# EAGLE board Paralysis_Assist_v1 (EAGLE 9.6.2)
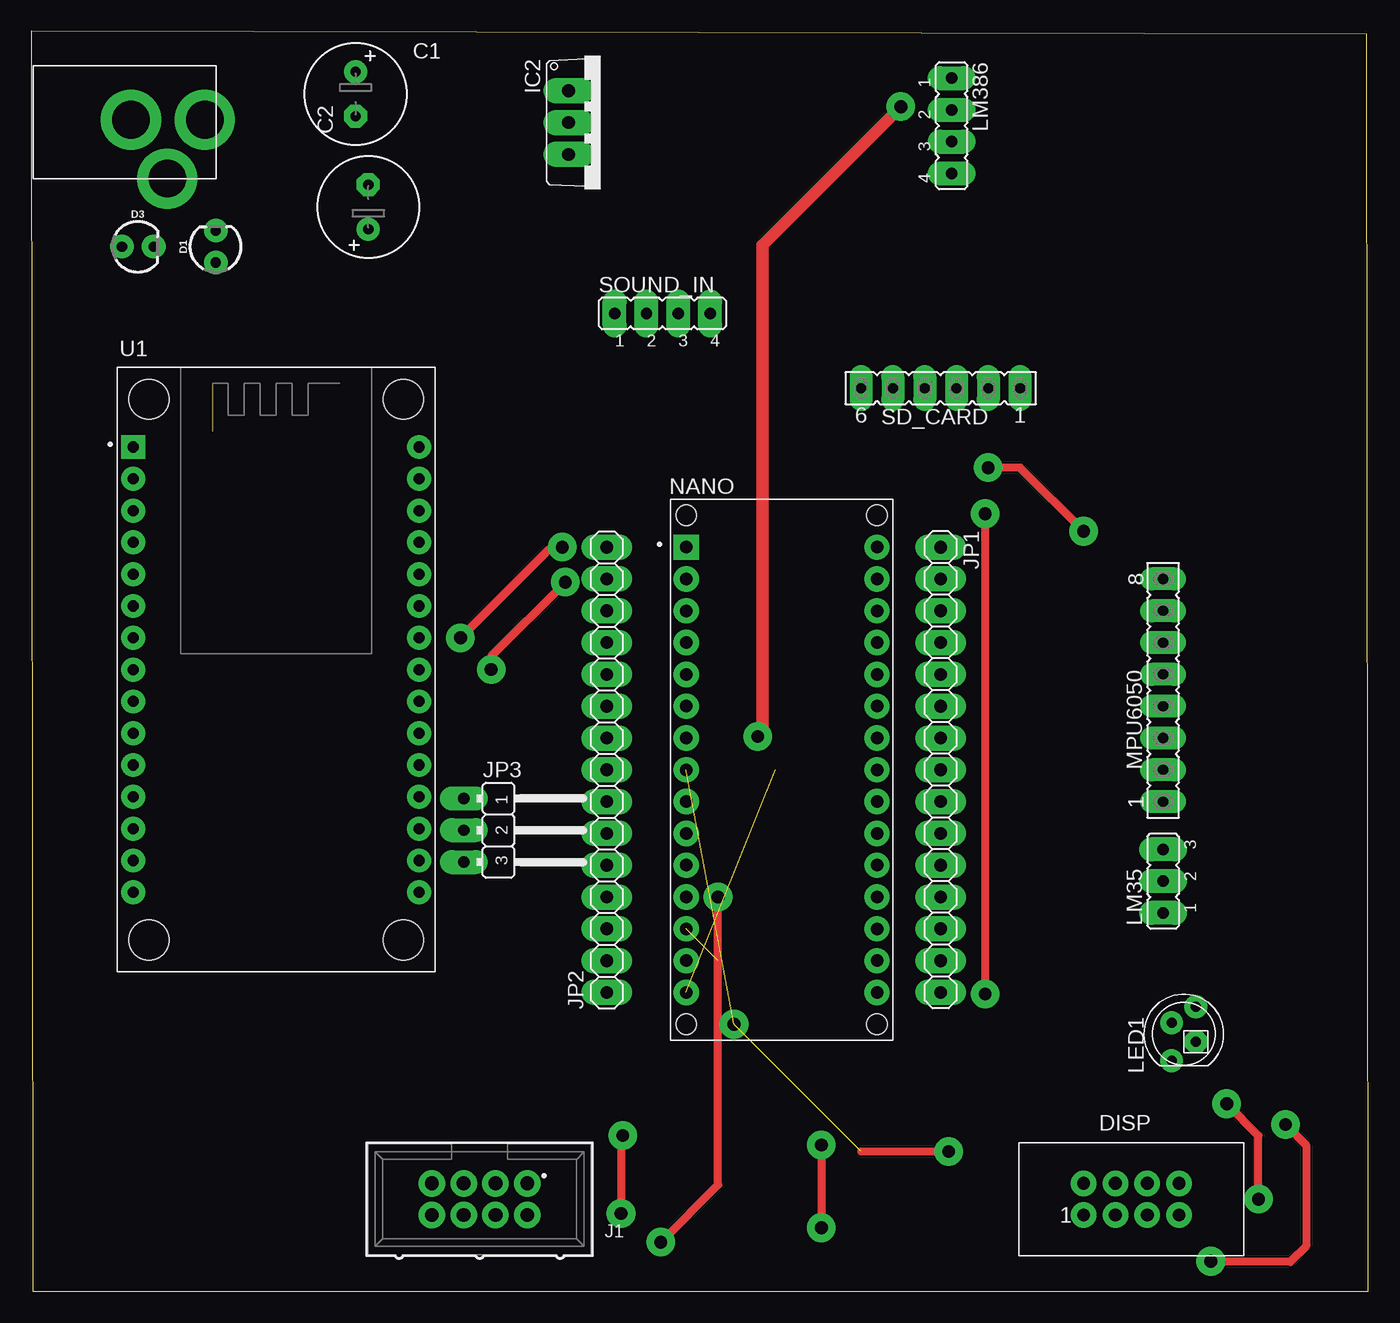
[diagram p0: board, top side]
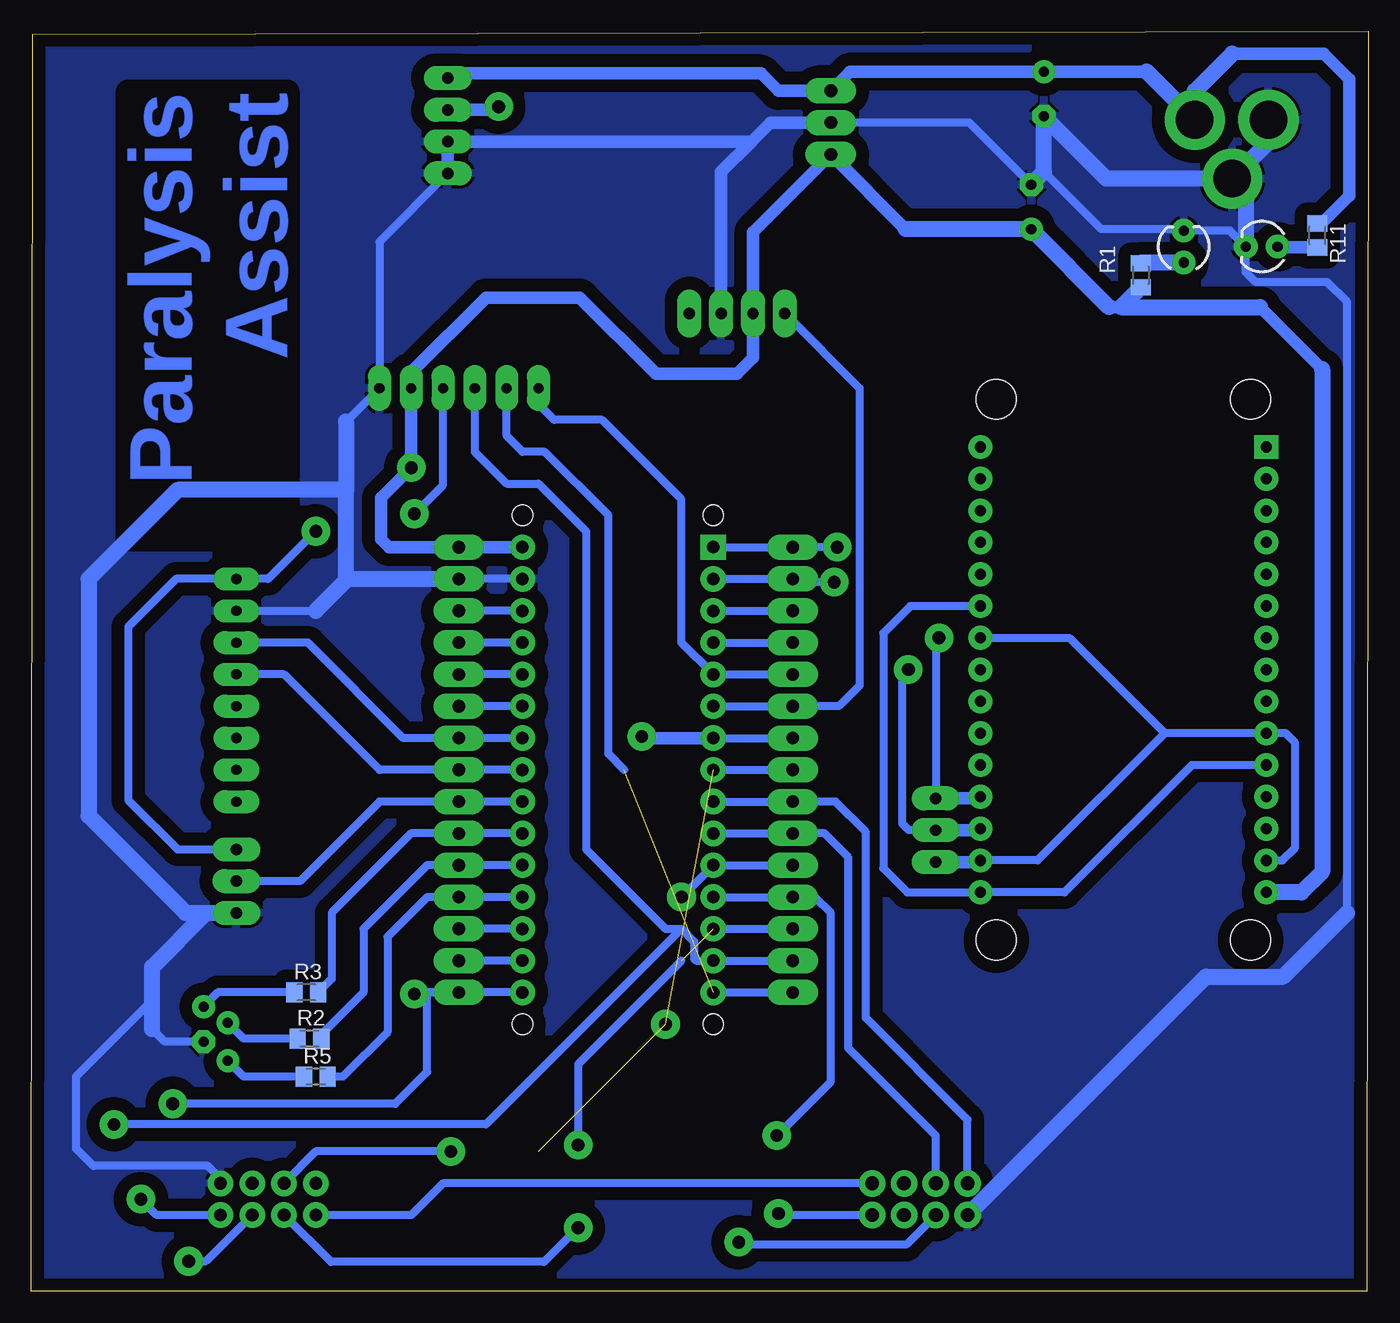
[diagram p1: board, bottom side, seen from below]

Size 106.81 x 100.64 mm. Coordinates in mm from the lower left corner, seen from the top.
Outline: 0.13,0 106.81,0 106.68,100.38 0,100.64 0.13,0
Copper layers (1*16): Top 0.035mm / dielectric 1.5mm / Bottom 0.035mm
Design rules "default *": minimum track width 25mil, minimum drill 0.35mm, track to track 6mil, track to pad 6mil, pad to pad 6mil, via to via 6mil, smd to smd 6mil, copper to edge 40mil, drill to drill 6mil, minimum pad ring 20mil, minimum via ring 25mil, stop-mask expansion 4mil, vias tented up to drill 0mil, thermal gap 10mil

## Footprints (pad centres in the part's own frame; a part is rotated, then mirrored left to right if it is on the bottom)
E3,5-8 = drill 0.813 pad 1.6: + -1.778,0 | drill 0.813 pad 1.6 octagon: - 1.778,0
LED_3MM = drill 0.813 pad 1.88: A -1.27,0; K 1.27,0
612008235121 = drill 1.02: 1 -3.81,-1.27; 2 -3.81,1.27; 3 -1.27,-1.27; 4 -1.27,1.27; 5 1.27,-1.27; 6 1.27,1.27; 7 3.81,-1.27; 8 3.81,1.27
TO220V = drill 1.016 long: 1 -2.54,-2.54; 2 0,-2.54; 3 2.54,-2.54
61200821621 = drill 1.1: 1 -3.81,-1.27; 2 -3.81,1.27; 3 -1.27,-1.27; 4 -1.27,1.27; 5 1.27,-1.27; 6 1.27,1.27; 7 3.81,-1.27; 8 3.81,1.27
1X15 = drill 1.016 long: 1 -17.78,0; 2 -15.24,0; 3 -12.7,0; 4 -10.16,0; 5 -7.62,0; 6 -5.08,0; 7 -2.54,0; 8 0,0; 9 2.54,0; 10 5.08,0; 11 7.62,0; 12 10.16,0; 13 12.7,0; 14 15.24,0; 15 17.78,0
JP2W = drill 0.914 long: 1 -2.54,-1.27; 2 0,-1.27; 3 2.54,-1.27
LED5MMRGB = drill 0.8 pad 1.676: 1 -2.159,0.968; 3 0.889,0.968; 4 2.159,-0.968 | drill 0.8 pad 1.676 octagon: 2 -0.635,-0.968
JP2 = drill 0.914 long: 1 -2.54,0; 2 0,0; 3 2.54,0
JP4 = drill 0.914 long: 1 -3.81,0; 2 -1.27,0; 3 1.27,0; 4 3.81,0
FE08 = drill 0.813 long: 1 -8.89,0; 2 -6.35,0; 3 -3.81,0; 4 -1.27,0; 5 1.27,0; 6 3.81,0; 7 6.35,0; 8 8.89,0
MODULE_A000005 = drill 1 square: 1 -7.62,17.78 | drill 1: 2 -7.62,15.24; 3 -7.62,12.7; 4 -7.62,10.16; 5 -7.62,7.62; 6 -7.62,5.08; 7 -7.62,2.54; 8 -7.62,0; 9 -7.62,-2.54; 10 -7.62,-5.08; 11 -7.62,-7.62; 12 -7.62,-10.16; 13 -7.62,-12.7; 14 -7.62,-15.24; 15 -7.62,-17.78; 16 7.62,-17.78; 17 7.62,-15.24; 18 7.62,-12.7; 19 7.62,-10.16; 20 7.62,-7.62; 21 7.62,-5.08; 22 7.62,-2.54; 23 7.62,0; 24 7.62,2.54; 25 7.62,5.08; 26 7.62,7.62; 27 7.62,10.16; 28 7.62,12.7; 29 7.62,15.24; 30 7.62,17.78 | hole 1.651: -7.62,-20.32; 7.62,-20.32; -7.62,20.32; 7.62,20.32
M0805 = smd 1.3 x 1.6: 1 -0.95,0; 2 0.95,0
FE06 = drill 0.813 long: 1 -6.35,0; 2 -3.81,0; 3 -1.27,0; 4 1.27,0; 5 3.81,0; 6 6.35,0
MODULE_ZC563900 = drill 0.889 pad 1.753 square: 1 -11.43,17.78 | drill 0.889 pad 1.753: 2 -11.43,15.24; 3 -11.43,12.7; 4 -11.43,10.16; 5 -11.43,7.62; 6 -11.43,5.08; 7 -11.43,2.54; 8 -11.43,0; 9 -11.43,-2.54; 10 -11.43,-5.08; 11 -11.43,-7.62; 12 -11.43,-10.16; 13 -11.43,-12.7; 14 -11.43,-15.24; 15 -11.43,-17.78; 16 11.43,-17.78; 17 11.43,-15.24; 18 11.43,-12.7; 19 11.43,-10.16; 20 11.43,-7.62; 21 11.43,-5.08; 22 11.43,-2.54; 23 11.43,0; 24 11.43,2.54; 25 11.43,5.08; 26 11.43,7.62; 27 11.43,10.16; 28 11.43,12.7; 29 11.43,15.24; 30 11.43,17.78 | hole 3.2: -10.16,21.59; 10.16,21.59; 10.16,-21.59; -10.16,-21.59
PJ-102A = drill 3 pad 4.8: RING 0.1,-3.39; RING_SW -4.6,-6.29; TIP 0.1,-9.29

## Placement (x,y rotation side)
C1  [E3,5-8]  25.91,95.63 270 top
C2  [E3,5-8]  26.92,86.61 90 top
D1  [LED_3MM]  14.73,83.44 90 top
D3  [LED_3MM]  8.51,83.44 0 top
DISP  [612008235121]  87.88,7.37 0 top
IC2  7805TV  [TO220V]  45.47,93.34 270 top
J1  [61200821621]  35.81,7.37 180 top
JP1  [1X15]  72.64,41.66 270 top
JP2  [1X15]  45.97,41.66 90 top
JP3  [JP2W]  35.81,36.83 270 top
LED1  RGBLED_CA-5MM  [LED5MMRGB]  92.08,20.57 90 top
LM35  [JP2]  90.42,32.77 90 top
LM386  [JP4]  73.53,93.09 270 top
MPU6050  [FE08]  90.42,48.01 90 top
NANO  A000005  [MODULE_A000005]  59.94,41.66 0 top
R1  1k  [M0805]  18.16,81.15 90 bottom
R2  1k  [M0805]  84.58,20.19 0 bottom
R3  1k  [M0805]  84.84,23.88 0 bottom
R5  1k  [M0805]  84.07,17.14 0 bottom
R11  1k  [M0805]  4.06,84.33 270 bottom
SD_CARD  [FE06]  72.64,72.14 180 top
SOUND_IN  [JP4]  50.42,78.11 0 top
U1  ZC563900  [MODULE_ZC563900]  19.56,49.66 0 top
U$3  2.1MMJACKTHM  [PJ-102A]  4.57,93.47 90 top

## Library data of the parts
C1 C2 JP1 JP2 LED1 R1-R3 R5 R11 U$3 = adafruit
D1 D3 = SparkFun-LED; PROD_ID: DIO-08794
DISP = Wurth_Elektronik_Electromechanic_Wire_to_Board_Connectors_rev19a
IC2 = linear
J1 = Wurth_Connectors_WR-BHD; CONTACT-RESISTANCE: 20mOhm; DATASHEET-URL: https://katalog.we-online.com/em/datasheet/61200821621.pdf; GENDER: Male; IR: 3A; L: 17.82mm; MATES: WR-BHD 2.54mm Female IDC Connector with Strain Relief; MOUNT: THT; PACKAGING: Tray; PART-NUMBER: 61200821621; PINS: 8; PITCH: 2.54mm; TOL-R: max.; TYPE: Straight; WORKING-VOLTAGE: 250V(AC)
JP3 LM35 LM386 SOUND_IN = jumper
MPU6050 SD_CARD = con-lsta; OC_FARNELL: unknown; OC_NEWARK: unknown
NANO = A000005; AVAILABILITY: Good; DESCRIPTION: ATmega328 Arduino Nano AVR® ATmega AVR MCU 8-Bit Embedded Evaluation Board; MF: Arduino; MP: A000005; PACKAGE: None; PRICE: None; PURCHASE-URL: https://pricing.snapeda.com/search/part/A000005/?ref=eda
U1 = nodemcuZC563900; AVAILABILITY: Unavailable; DESCRIPTION: NodeMcu Lua ESP8266 WIFI Internet of Things Network Development Module Board; MF: YKS; MP: ZC563900; PACKAGE: None; PRICE: None

## Nets
3V3: U1.11 U1.16 U1.25
5V: C2.+ IC2.3 JP1.1 LM35.3 MPU6050.8 NANO.30 R1.1 SD_CARD.2 SOUND_IN.2 U1.15
5V0: JP1.4 NANO.27
9_IN: C1.+ IC2.1 LM386.1 R11.1 U$3.TIP
A6: JP1.6 NANO.25
A7: JP1.5 NANO.26
AD0: MPU6050.2
AREF: JP1.13 NANO.18
AUDIO_OUT: JP2.9 LM386.2 NANO.7
BACK: J1.6 JP2.5 NANO.11
BLUE: JP1.10 NANO.21 R3.2
CS_DISP: DISP.3 JP2.3 NANO.13
CS_SDCARD: JP2.11 NANO.5 SD_CARD.6
DOWN: J1.4
GND: C1.- C2.- D1.K D3.K DISP.8 IC2.2 J1.8 JP1.2 LED1.2 LM35.1 LM386.3 LM386.4 MPU6050.7 NANO.29 SD_CARD.1 SOUND_IN.3 U$3.RING U$3.RING_SW
GND_1: JP2.12 NANO.4
GREEN: JP1.11 NANO.20 R2.2
INT: MPU6050.1
LEFT: J1.5 JP2.6 NANO.10
MISO: JP2.1 NANO.15 SD_CARD.5
MOSI: DISP.5 JP2.2 NANO.14 SD_CARD.4
N$1: DISP.2
N$2: D3.A R11.2
N$3: D1.A R1.2
N$4: LED1.4 R3.1
N$5: DISP.6
N$6: LED1.3 R2.1
N$7: LED1.1 R5.1
N$8: JP1.14 NANO.17
N$10: JP3.3 U1.10 U1.14 U1.17 U1.24
OK: J1.7 JP2.7 NANO.9
RED: JP1.12 NANO.19 R5.2
RESET_1: JP2.13 NANO.3
RESET_2: JP1.3 NANO.28
RIGHT: J1.2 JP2.4 NANO.12
RST: DISP.4 JP2.8 NANO.8
RXNANO: JP2.14 JP3.2 NANO.2 U1.18
SCK: DISP.7 JP1.15 NANO.16 SD_CARD.3
SCL: JP1.7 MPU6050.6 NANO.24
SDA: JP1.8 MPU6050.5 NANO.23
SOUND_A0: SOUND_IN.4
SOUND_D0: JP2.10 NANO.6 SOUND_IN.1
TEMP: JP1.9 LM35.2 NANO.22
TXNANO: JP2.15 JP3.1 NANO.1 U1.19
UP: J1.3
VCC: DISP.1 J1.1
XCL: MPU6050.3
XDA: MPU6050.4

## Tracks (layer width: path | path; a pad name or v marks a point on that pad's centre or on a via)
3V3
  Bottom 0.635: U1.11 14.1,42.04 24.26,31.88 U1.16 36.83,31.88 38.73,33.78 38.73,52.58 36.58,54.74 U1.25
5V  (via drill 1.02)
  Top 0.635: v84.07,60.71 78.99,65.79 v76.45,65.79
  Bottom 0.635: v84.07,60.71 87.88,56.9 MPU6050.8 95.25,56.9 99.06,53.09 99.06,39.24 95.12,35.31 LM35.3 | 62.74,79.38 62.99,79.38
  Bottom 1.016: 36.96,84.84 IC2.3 49.15,84.58 SOUND_IN.2 49.15,74.55 50.42,73.28 56.9,73.28 62.99,79.38 70.48,79.38 76.45,73.41 SD_CARD.2 v76.45,65.79 78.87,63.37 78.87,60.07 78.23,59.44 JP1.1 NANO.30 | 8.64,78.61 3.68,73.66 | 19.75,78.61 20.7,78.61
  Bottom 1.27: 20.7,78.61 C2.+ 36.96,84.84 | 8.64,78.61 19.75,78.61 R1.1 | U1.15 5.33,31.88 3.68,33.53 3.68,73.66
5V0
  Bottom 0.635: NANO.27 JP1.4
9_IN
  Bottom 1.016: 17.7,97.41 C1.+ 41.4,97.41 IC2.1 47.12,95.89 48.51,97.28 73.15,97.28 LM386.1 | 10.87,98.86 3.56,98.86 1.52,96.83 1.52,87.5 3.75,85.28 R11.1
  Bottom 1.27: 17.7,97.41 U$3.TIP 13.86,95.87 10.87,98.86
A6
  Bottom 0.635: NANO.25 JP1.6
A7
  Bottom 0.635: NANO.26 JP1.5
AREF
  Bottom 0.635: NANO.18 JP1.13
AUDIO_OUT  (via drill 1.02)
  Top 1.016: v69.47,94.61 58.42,83.57 58.42,44.7 v58.04,44.32
  Bottom 0.635: NANO.7 JP2.9
  Bottom 1.016: LM386.2 69.72,94.36 v69.47,94.61 | NANO.7 57.91,44.2 v58.04,44.32
BACK  (via drill 1.02)
  Top 0.635: v50.29,3.93 54.86,8.51 v54.86,31.5
  Bottom 0.635: JP2.5 NANO.11 v54.86,31.5 | J1.6 36.89,3.75 50.1,3.75 v50.29,3.93
BLUE
  Bottom 0.635: NANO.21 JP1.10 76.45,36.58 82.8,30.23 82.8,24.96 R3.2
CS_DISP  (via drill 1.02)  (1 unrouted)
  Top 0.635: v63.12,11.68 v63.12,5.08
  Bottom 0.635: v63.12,11.68 63.12,18.16 54.86,26.42 | DISP.3 82.87,2.35 65.85,2.35 v63.12,5.08 | NANO.13 JP2.3
CS_SDCARD
  Bottom 0.635: JP2.11 NANO.5 54.86,51.82 54.86,63.25 61.21,69.6 65.02,69.6 66.29,70.87 SD_CARD.6
GND
  Bottom 0.635: NANO.29 JP1.2 | MPU6050.7 84.07,54.36 | 81.66,56.9 81.53,56.9 | 81.66,69.47 SD_CARD.1 78.99,83.82 LM386.4 | LED1.2 96.14,19.94 97.16,20.96 | 97.16,23.24 103.25,17.14 103.25,11.43 101.85,10.03 92.71,10.03 91.69,9.02 DISP.8 | 81.66,63.88 81.79,64.01 | 1.69,30.23 1.69,79.02 3.28,80.61 8.98,80.61 9.78,81.41 D3.K 11.05,84.71 D1.K 14.86,84.84 21.34,84.84 25.91,89.41 | C2.- 31.88,93.34 IC2.2
  Bottom 1.016: 9.75,88.87 U$3.RING_SW | IC2.2 47.75,93.34 49.28,91.82 | 49.28,91.82 LM386.3 LM386.4 | SOUND_IN.3 51.69,89.41 49.28,91.82
  Bottom 1.27: 84.07,54.36 81.53,56.9 JP1.2 | 81.66,69.47 81.66,63.88 81.66,56.9 | U$3.RING_SW 7.96,91.77 U$3.RING | C2.- 25.91,89.41 C1.- 20.93,88.87 U$3.RING_SW | U$3.RING_SW 9.78,87.79 D3.K | 97.16,20.96 97.16,23.24 97.16,25.91 92.84,30.23 | 92.84,30.23 LM35.1 | 81.79,64.01 95.12,64.01 102.23,56.9 102.23,37.97 94.49,30.23 92.84,30.23 | J1.8 12.97,25.13 6.79,25.13 1.69,30.23
  pour Bottom (isolate 1.016): 0,100.33 0,0.38 106.68,0.38 106.68,100.2 0.13,100.2
GND_1
  Bottom 0.635: NANO.4 JP2.12
GREEN
  Bottom 0.635: NANO.20 JP1.11 75.18,34.04 80.26,28.96 80.26,23.88 83.63,20.51 R2.2
LEFT
  Bottom 0.635: J1.5 34.54,12.45 41.53,19.43 41.53,34.67 43.43,36.58 JP2.6 NANO.10
MISO  (1 unrouted)
  Bottom 0.635: 59.44,41.66 60.71,42.93 60.71,61.98 65.79,67.06 67.56,67.06 68.83,68.33 SD_CARD.5 | NANO.15 JP2.1
MOSI  (via drill 1.02)
  Top 0.635: v100.2,13.34 101.85,11.68 101.85,3.62 100.58,2.35 94.23,2.35 v94.23,2.41
  Bottom 0.635: SD_CARD.4 71.37,67.06 68.83,64.52 66.29,64.52 62.48,60.71 62.48,35.31 56.13,28.96 54.86,28.96 | v94.23,2.41 92.84,2.41 DISP.5 | v100.2,13.34 70.48,13.34 54.86,28.96 | JP2.2 NANO.14 53.72,26.42 53.85,26.54 53.85,27.94 54.86,28.96
N$2
  Bottom 1.016: R11.2 7.18,83.38 D3.A
N$3
  Bottom 1.27: D1.A 18.09,82.17 R1.2
N$4
  Bottom 0.635: R3.1 91.9,23.88 LED1.4
N$6
  Bottom 0.635: R2.1 89.84,20.19 LED1.3
N$7
  Bottom 0.635: R5.1 89.84,17.14 LED1.1
N$8
  Bottom 0.635: NANO.17 JP1.14
N$10
  Bottom 0.635: 16.26,44.58 U1.10 6.6,44.58 5.84,43.81 5.84,35.43 6.86,34.42 U1.14 | U1.17 26.42,34.42 16.26,44.58 | U1.24 23.88,52.2 16.26,44.58
  Bottom 1.016: JP3.3 31.11,34.29 U1.17
OK
  Bottom 0.635: J1.7 32,13.72 40.13,21.84 40.13,36.7 42.55,39.12 JP2.7 NANO.9
RED
  Bottom 0.635: NANO.19 JP1.12 75.18,31.5 78.36,28.32 78.36,20.7 81.92,17.14 R5.2
RESET_1
  Bottom 0.635: NANO.3 JP2.13
RESET_2
  Bottom 0.635: NANO.28 JP1.3
RIGHT  (via drill 1.02)
  Top 0.635: v47.12,6.22 47.12,12.32 v47.24,12.45
  Bottom 0.635: NANO.12 JP2.4 44.2,31.5 42.93,30.23 42.93,16.76 v47.24,12.45 | J1.2 46.99,6.1 v47.12,6.22
RST  (via drill 1.02)  (2 unrouted)
  Top 0.635: 66.29,11.18 v73.28,11.18
  Bottom 0.635: v73.28,11.18 84.07,11.18 DISP.4 | NANO.8 JP2.8
  other vias: 56.13,21.34
RXNANO  (via drill 1.02)
  Top 0.635: v36.74,49.66 36.74,50.71 v42.67,56.64
  Bottom 0.635: NANO.2 JP2.14 45.72,56.64 v42.67,56.64 | JP3.2 36.7,36.83 37.25,37.38 37.25,49.15 v36.74,49.66
  Bottom 1.016: JP3.2 31.11,36.83 U1.18
SCK  (via drill 1.02)
  Top 0.635: v98.04,7.37 98.04,12.45 v95.5,14.99 | v76.2,62.1 v76.2,23.75
  Bottom 0.635: NANO.16 JP1.15 | DISP.7 96.77,6.1 v98.04,7.37 | JP1.15 75.18,23.88 75.18,17.53 77.72,14.99 v95.5,14.99 | JP1.15 76.07,23.88 v76.2,23.75 | v76.2,62.1 73.91,64.39 SD_CARD.3
SCL
  Bottom 0.635: NANO.24 JP1.7 77.09,44.2 84.71,51.82 MPU6050.6
SDA
  Bottom 0.635: NANO.23 JP1.8 78.99,41.66 86.61,49.28 MPU6050.5
SOUND_D0
  Bottom 0.635: SOUND_IN.1 40.64,72.14 40.64,48.39 42.29,46.74 JP2.10 NANO.6
TEMP
  Bottom 0.635: NANO.22 JP1.9 78.99,39.12 85.34,32.77 LM35.2
TXNANO  (via drill 1.02)
  Top 0.635: v34.29,52.2 41.4,59.31 42.29,59.31 v42.42,59.44
  Bottom 0.635: NANO.1 JP2.15 v42.42,59.44 | v34.29,52.2 34.54,52.2 JP3.1
  Bottom 1.016: U1.19 31.11,39.37 JP3.1
VCC
  Bottom 0.635: J1.1 73.91,8.64 76.45,6.1 DISP.1

## Text on the board
Bottom: Paralysis / Assist